# EAGLE board DMB-4771-8-IN-8-OUT-C-leds (EAGLE 6.5.0)
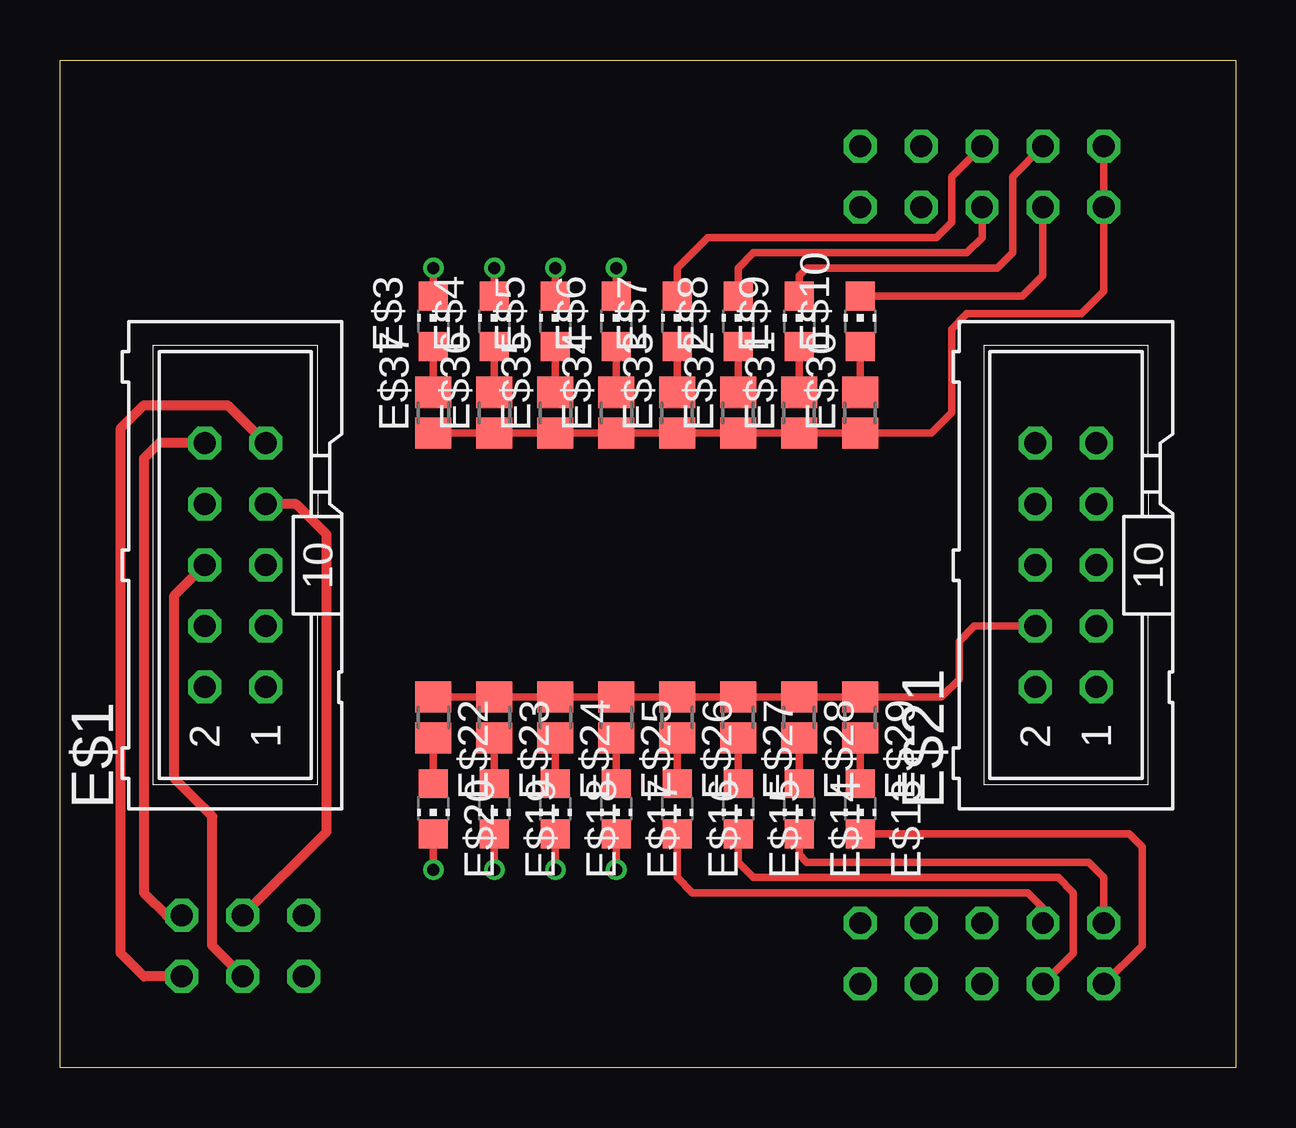
[diagram p0: board, top side]
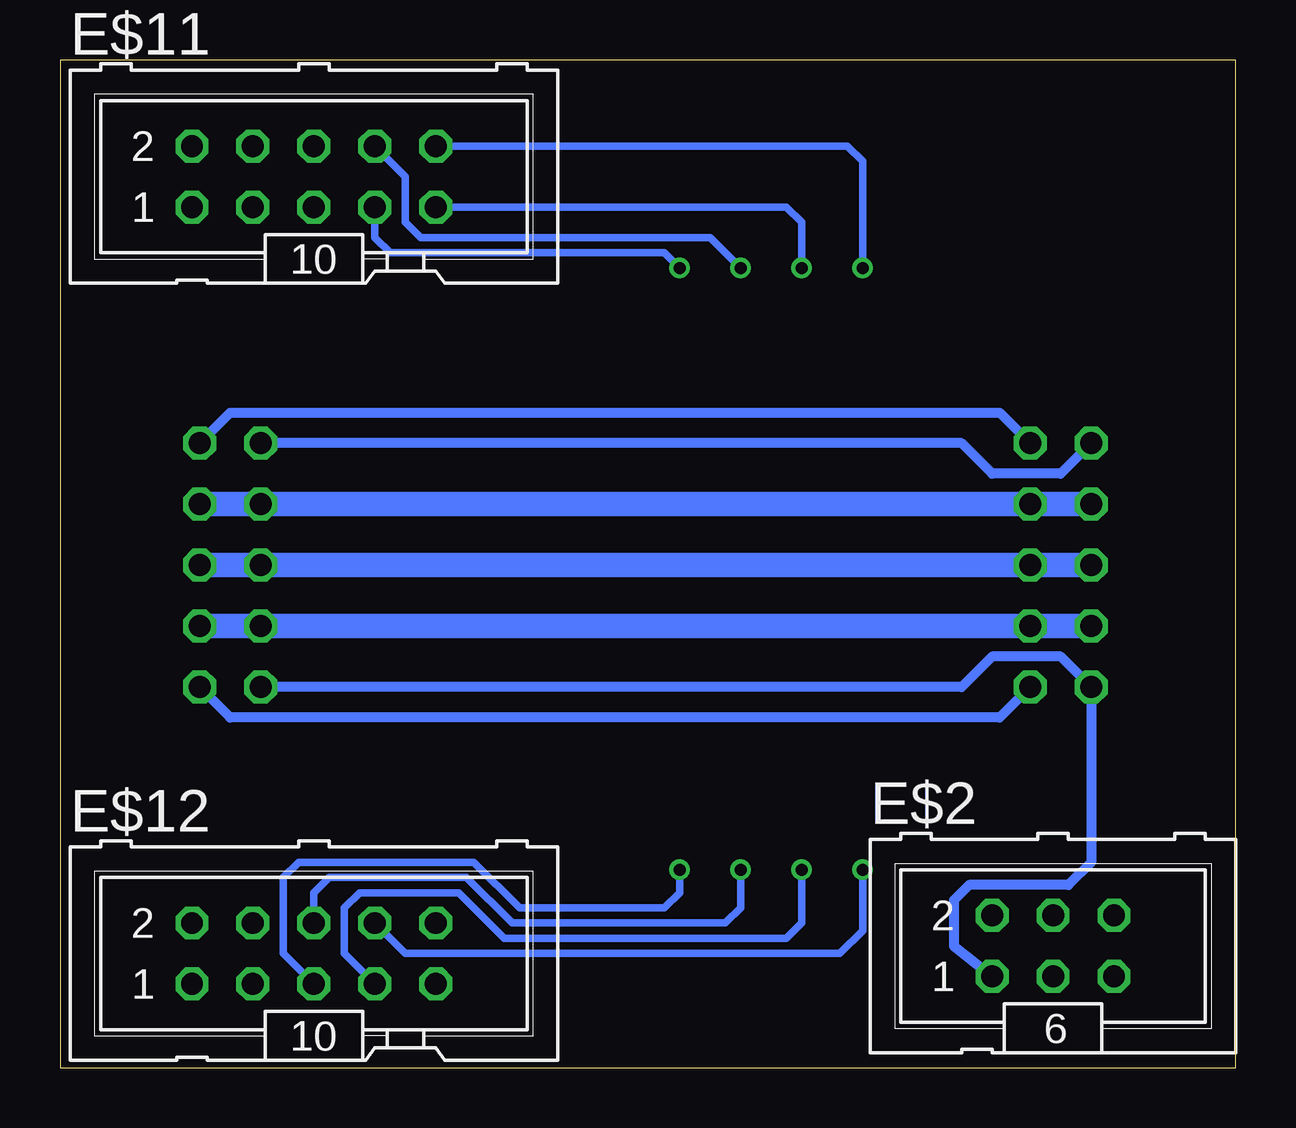
[diagram p1: board, bottom side, seen from below]

Size 49 x 42.01 mm. Coordinates in mm from the lower left corner, seen from the top.
Outline: 0,42.01 49,42.01 49,0 0,0 0,42.01
Copper layers (1*16): Top 0.0356mm / dielectric 1.5011mm / Bottom 0.0356mm
Design rules "LaenPCBOrder": minimum track width 6mil, minimum drill 13mil, track to track 6mil, track to pad 6mil, pad to pad 6mil, via to via 6mil, smd to smd 6mil, copper to edge 15mil, drill to drill 6mil, minimum pad ring 7mil, minimum via ring 7mil, stop-mask expansion 3mil, vias tented up to drill 0mil, thermal gap 10mil

## Footprints (pad centres in the part's own frame; a part is rotated, then mirrored left to right if it is on the bottom)
ML10 = drill 0.914 octagon: 1 -5.08,-1.27; 2 -5.08,1.27; 3 -2.54,-1.27; 4 -2.54,1.27; 5 0,-1.27; 6 0,1.27; 7 2.54,-1.27; 8 2.54,1.27; 9 5.08,-1.27; 10 5.08,1.27
ML6 = drill 0.914 octagon: 1 -2.54,-1.27; 2 -2.54,1.27; 3 0,-1.27; 4 0,1.27; 5 2.54,-1.27; 6 2.54,1.27
CHIP-LED0805 = smd 1.2 x 1.2: A 0,-1.05; C 0,1.05
R0805 = smd 1.3 x 1.5: 1 -0.85,0; 2 0.85,0

## Placement (x,y rotation side)
E$1  [ML10]  7.3,20.95 90 top
E$2  [ML6]  7.62,5.08 0 bottom
E$3  [CHIP-LED0805]  15.56,31.11 0 top
E$4  [CHIP-LED0805]  18.1,31.11 0 top
E$5  [CHIP-LED0805]  20.64,31.11 0 top
E$6  [CHIP-LED0805]  23.18,31.11 0 top
E$7  [CHIP-LED0805]  25.72,31.11 0 top
E$8  [CHIP-LED0805]  28.26,31.11 0 top
E$9  [CHIP-LED0805]  30.8,31.11 0 top
E$10  [CHIP-LED0805]  33.34,31.11 0 top
E$11  [ML10]  38.42,37.15 0 bottom
E$12  [ML10]  38.42,4.76 0 bottom
E$13  [CHIP-LED0805]  33.34,10.79 180 top
E$14  [CHIP-LED0805]  30.8,10.79 180 top
E$15  [CHIP-LED0805]  28.26,10.79 180 top
E$16  [CHIP-LED0805]  25.72,10.79 180 top
E$17  [CHIP-LED0805]  23.18,10.79 180 top
E$18  [CHIP-LED0805]  20.64,10.79 180 top
E$19  [CHIP-LED0805]  18.1,10.79 180 top
E$20  [CHIP-LED0805]  15.56,10.79 180 top
E$21  [ML10]  41.91,20.95 90 top
E$22  [R0805]  15.56,14.61 270 top
E$23  [R0805]  18.1,14.61 270 top
E$24  [R0805]  20.64,14.61 270 top
E$25  [R0805]  23.18,14.61 270 top
E$26  [R0805]  25.72,14.61 270 top
E$27  [R0805]  28.26,14.61 270 top
E$28  [R0805]  30.8,14.61 270 top
E$29  [R0805]  33.34,14.61 270 top
E$30  [R0805]  33.34,27.3 90 top
E$31  [R0805]  30.8,27.3 90 top
E$32  [R0805]  28.26,27.3 90 top
E$33  [R0805]  25.72,27.3 90 top
E$34  [R0805]  23.18,27.3 90 top
E$35  [R0805]  20.64,27.3 90 top
E$36  [R0805]  18.1,27.3 90 top
E$37  [R0805]  15.56,27.3 90 top

## Library data of the parts
E$1 E$2 E$11 E$12 E$21 = con-harting-ml
E$3-E$10 E$13-E$20 = led
E$22-E$37 = resistor

## Nets
S$8: E$1.7 E$1.8 E$2.4 E$21.7 E$21.8
S$26: E$1.3 E$1.4 E$21.3 E$21.4 E$22.1 E$23.1 E$24.1 E$25.1 E$26.1 E$27.1 E$28.1 E$29.1
S$27: E$12.8 E$20.C
S$28: E$12.7 E$19.C
S$29: E$12.6 E$18.C
S$34: E$12.5 E$17.C
S$35: E$12.4 E$16.C
S$36: E$12.3 E$15.C
S$37: E$12.2 E$14.C
S$38: E$12.1 E$13.C
S$39: E$20.A E$22.2
S$40: E$19.A E$23.2
S$41: E$18.A E$24.2
S$42: E$17.A E$25.2
S$43: E$16.A E$26.2
S$44: E$15.A E$27.2
S$45: E$14.A E$28.2
S$46: E$13.A E$29.2
S$80: E$1.10 E$2.6 E$21.10
S$81: E$3.C E$11.10
S$83: E$10.A E$30.2
S$84: E$1.9 E$2.5 E$21.9
S$85: E$9.A E$31.2
S$86: E$8.A E$32.2
S$88: E$1.5 E$1.6 E$2.3 E$21.5 E$21.6
S$89: E$7.A E$33.2
S$90: E$1.2 E$2.1 E$21.2
S$91: E$1.1 E$21.1
S$92: E$6.A E$34.2
S$93: E$5.A E$35.2
S$94: E$4.A E$36.2
S$95: E$3.A E$37.2
S$96: E$4.C E$11.9
S$97: E$5.C E$11.8
S$98: E$6.C E$11.7
S$99: E$7.C E$11.6
S$100: E$8.C E$11.5
S$102: E$9.C E$11.4
S$103: E$10.C E$11.3
S$104: E$11.1 E$11.2 E$30.1 E$31.1 E$32.1 E$33.1 E$34.1 E$35.1 E$36.1 E$37.1

## Tracks (layer width: path | path; a pad name or v marks a point on that pad's centre or on a via)
S$8
  Top 0.406: E$2.4 11.11,9.84 11.11,22.23 9.84,23.5 E$1.7
  Bottom 1.016: E$21.7 E$21.8 E$1.7 E$1.8
S$26
  Top 0.305: E$22.1 E$23.1 E$24.1 E$25.1 E$26.1 E$27.1 E$28.1 E$29.1 36.73,15.46 37.47,16.19 37.47,17.78 38.1,18.41 E$21.4
  Bottom 1.016: E$21.3 E$21.4 E$1.3 E$1.4
S$27  (via drill 0.5)
  Top 0.305: E$20.C v15.56,8.26
  Bottom 0.305: E$12.8 34.61,4.76 16.51,4.76 15.56,5.71 v15.56,8.26
S$28  (via drill 0.5)
  Top 0.305: E$19.C v18.1,8.26
  Bottom 0.305: E$12.7 37.15,4.76 37.15,6.67 36.51,7.3 32.38,7.3 30.48,5.4 18.73,5.4 18.1,6.03 18.1,6.35 v18.1,8.26
S$29  (via drill 0.5)
  Top 0.305: E$18.C v20.64,8.26
  Bottom 0.305: E$12.6 38.42,7.3 37.78,7.94 32.07,7.94 30.16,6.03 21.27,6.03 20.64,6.67 20.64,7.94 v20.64,8.26
S$34  (via drill 0.5)
  Top 0.305: E$17.C v23.18,8.26
  Bottom 0.305: E$12.5 39.69,4.76 39.69,7.94 39.05,8.57 31.75,8.57 29.84,6.67 23.81,6.67 23.18,7.3 v23.18,8.26
S$35
  Top 0.305: E$12.4 40.96,6.67 40.32,7.3 26.35,7.3 25.72,7.94 E$16.C
S$36
  Top 0.305: E$15.C 28.26,8.57 28.89,7.94 41.59,7.94 42.23,7.3 42.23,4.76 E$12.3
S$37
  Top 0.305: E$12.2 43.5,7.94 42.86,8.57 31.11,8.57 30.8,8.89 E$14.C
S$38
  Top 0.305: E$13.C 44.55,9.74 45.09,9.21 45.09,5.08 E$12.1
S$39
  Top 0.305: E$20.A E$22.2
S$40
  Top 0.305: E$23.2 E$19.A
S$41
  Top 0.305: E$18.A E$24.2
S$42
  Top 0.305: E$25.2 E$17.A
S$43
  Top 0.305: E$16.A E$26.2
S$44
  Top 0.305: E$27.2 E$15.A
S$45
  Top 0.305: E$14.A E$28.2
S$46
  Top 0.305: E$29.2 E$13.A
S$80
  Top 0.406: E$1.10 4.13,26.04 3.49,25.4 3.49,7.3 4.45,6.35 E$2.6
  Bottom 0.406: E$21.10 11.43,26.04 10.16,24.77 7.3,24.77 E$1.10
S$81  (via drill 0.5)
  Top 0.305: E$3.C v15.56,33.34
  Bottom 0.305: E$11.10 16.19,38.42 15.56,37.78 v15.56,33.34
S$83
  Top 0.305: E$10.A E$30.2
S$84
  Top 0.406: E$2.5 3.49,3.81 2.54,4.76 2.54,26.67 3.49,27.62 6.99,27.62 E$1.9
  Bottom 0.406: E$21.9 41.91,27.3 9.84,27.3 E$1.9
S$85
  Top 0.305: E$31.2 E$9.A
S$86
  Top 0.305: E$8.A E$32.2
S$88
  Top 0.406: E$2.3 6.35,5.08 6.35,10.48 6.03,10.79 4.76,12.06 4.76,19.68 E$1.6
  Bottom 1.016: E$21.5 E$21.6 E$1.5 E$1.6
S$89
  Top 0.305: E$33.2 E$7.A
S$90
  Bottom 0.406: E$21.2 11.43,15.88 10.16,17.14 7.3,17.14 E$1.2 6.03,8.57 6.99,7.62 11.11,7.62 11.75,6.99 11.75,5.08 E$2.1
S$91
  Bottom 0.406: E$21.1 41.91,14.61 9.84,14.61 E$1.1
S$92
  Top 0.305: E$6.A E$34.2
S$93
  Top 0.305: E$35.2 E$5.A
S$94
  Top 0.305: E$4.A E$36.2
S$95
  Top 0.305: E$37.2 E$3.A
S$96  (via drill 0.5)
  Top 0.305: E$4.C v18.1,33.34
  Bottom 0.305: E$11.9 18.73,35.88 18.1,35.24 v18.1,33.34
S$97  (via drill 0.5)
  Top 0.305: E$5.C v20.64,33.34
  Bottom 0.305: E$11.8 34.61,37.15 34.61,35.24 33.97,34.61 21.91,34.61 v20.64,33.34
S$98  (via drill 0.5)
  Top 0.305: E$6.C v23.18,33.34
  Bottom 0.305: E$11.7 35.88,34.61 35.24,33.97 23.81,33.97 v23.18,33.34
S$99
  Top 0.305: E$11.6 37.15,37.15 37.15,35.24 36.51,34.61 26.99,34.61 25.72,33.34 E$7.C
S$100
  Top 0.305: E$11.5 38.42,34.61 37.78,33.97 28.89,33.97 28.26,33.34 E$8.C
S$102
  Top 0.305: E$11.4 39.69,37.15 39.69,33.97 39.05,33.34 31.11,33.34 30.8,33.02 E$9.C
S$103
  Top 0.305: E$10.C 40.1,32.16 40.96,33.02 E$11.3
S$104
  Top 0.305: E$37.1 E$36.1 E$35.1 E$34.1 E$33.1 E$32.1 E$31.1 E$30.1 36.3,26.45 37.15,27.3 37.15,30.8 37.78,31.43 42.55,31.43 43.5,32.38 E$11.1 E$11.2

## Text on the board
tDocu: Inputs | RTD1 | RTD2 | RTD3 | RTD4 | 1 | 2 | 3 | 4 | 5 | 6 | 7 | 8 | GND | PWM1 | PWM2 | PWM3 | PWM4 | POWER | 1 | 2 | 3 | 4 | 5 | 6 | 7 | 8